# Altium PCB Lidar_MCU_PCB_4.PcbDoc
Units mm, origin at the board's own origin, x right, y up, seen from the top; angles counter-clockwise.
Board outline 72.35 x 42.48 mm, 4 copper layers (Top Layer 1, GND, 3V3, Bottom Layer 1), stack 0.567 mm thick; 42 components, 55 nets, 243 pads, 70 vias.
Unrouted connection lines stored in the file: 6.
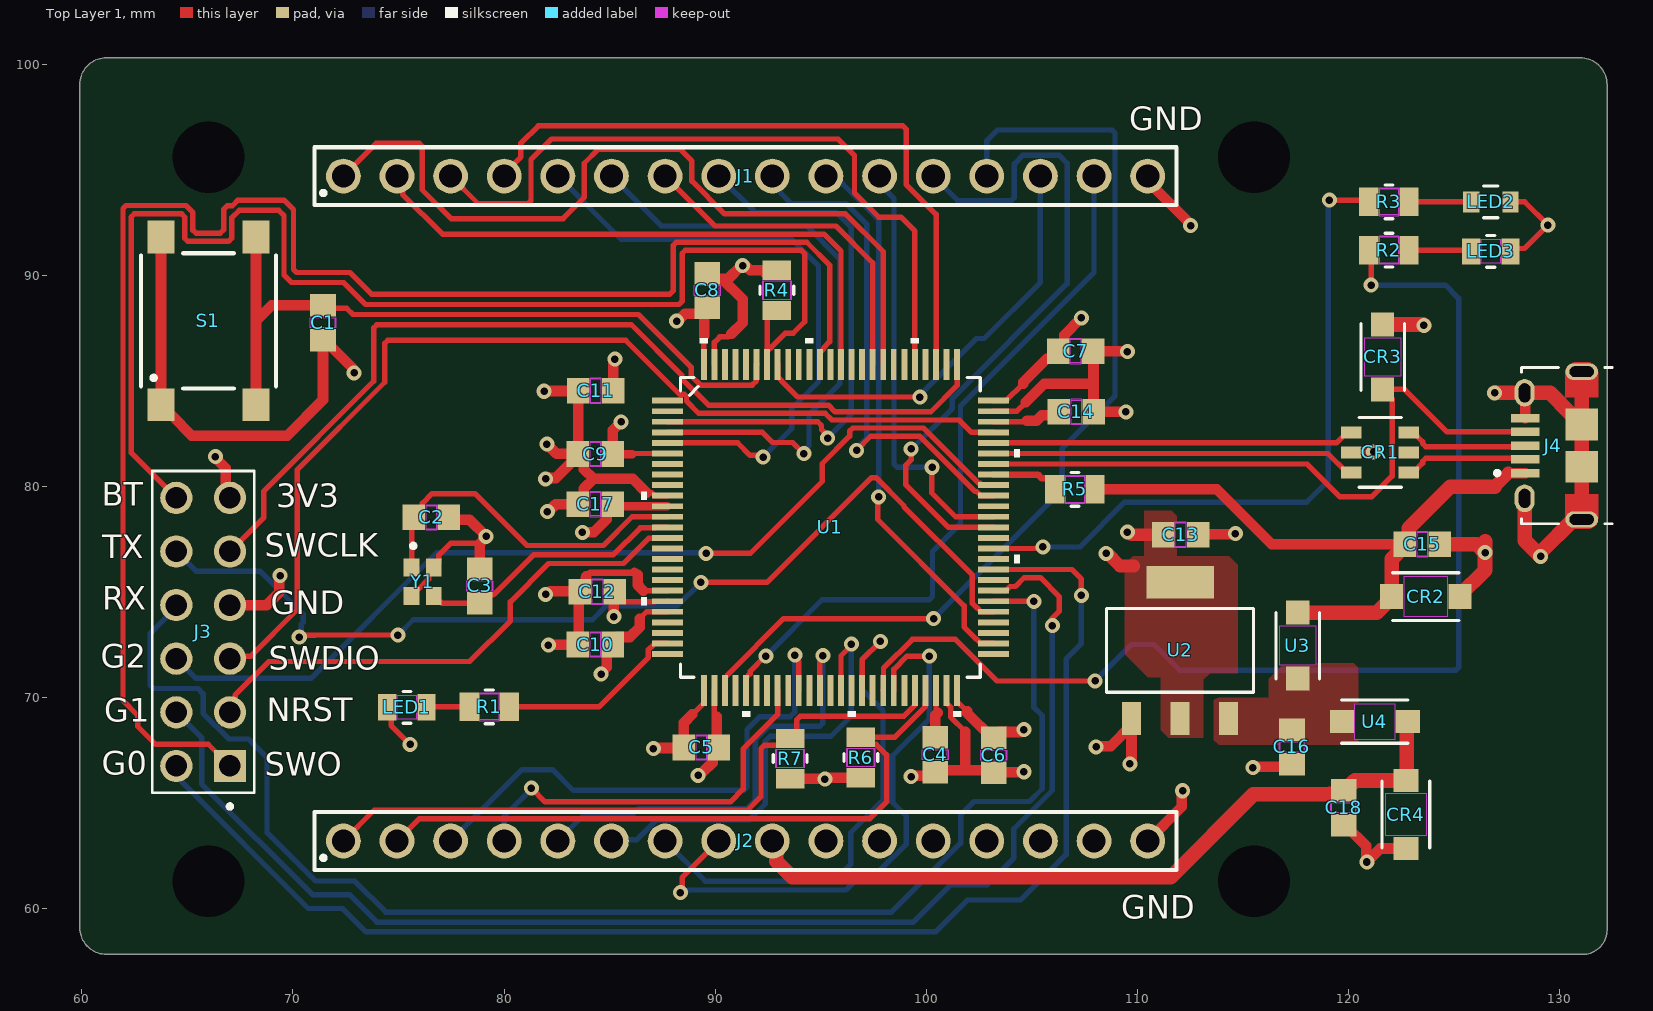
[diagram p0: Top Layer 1 view]
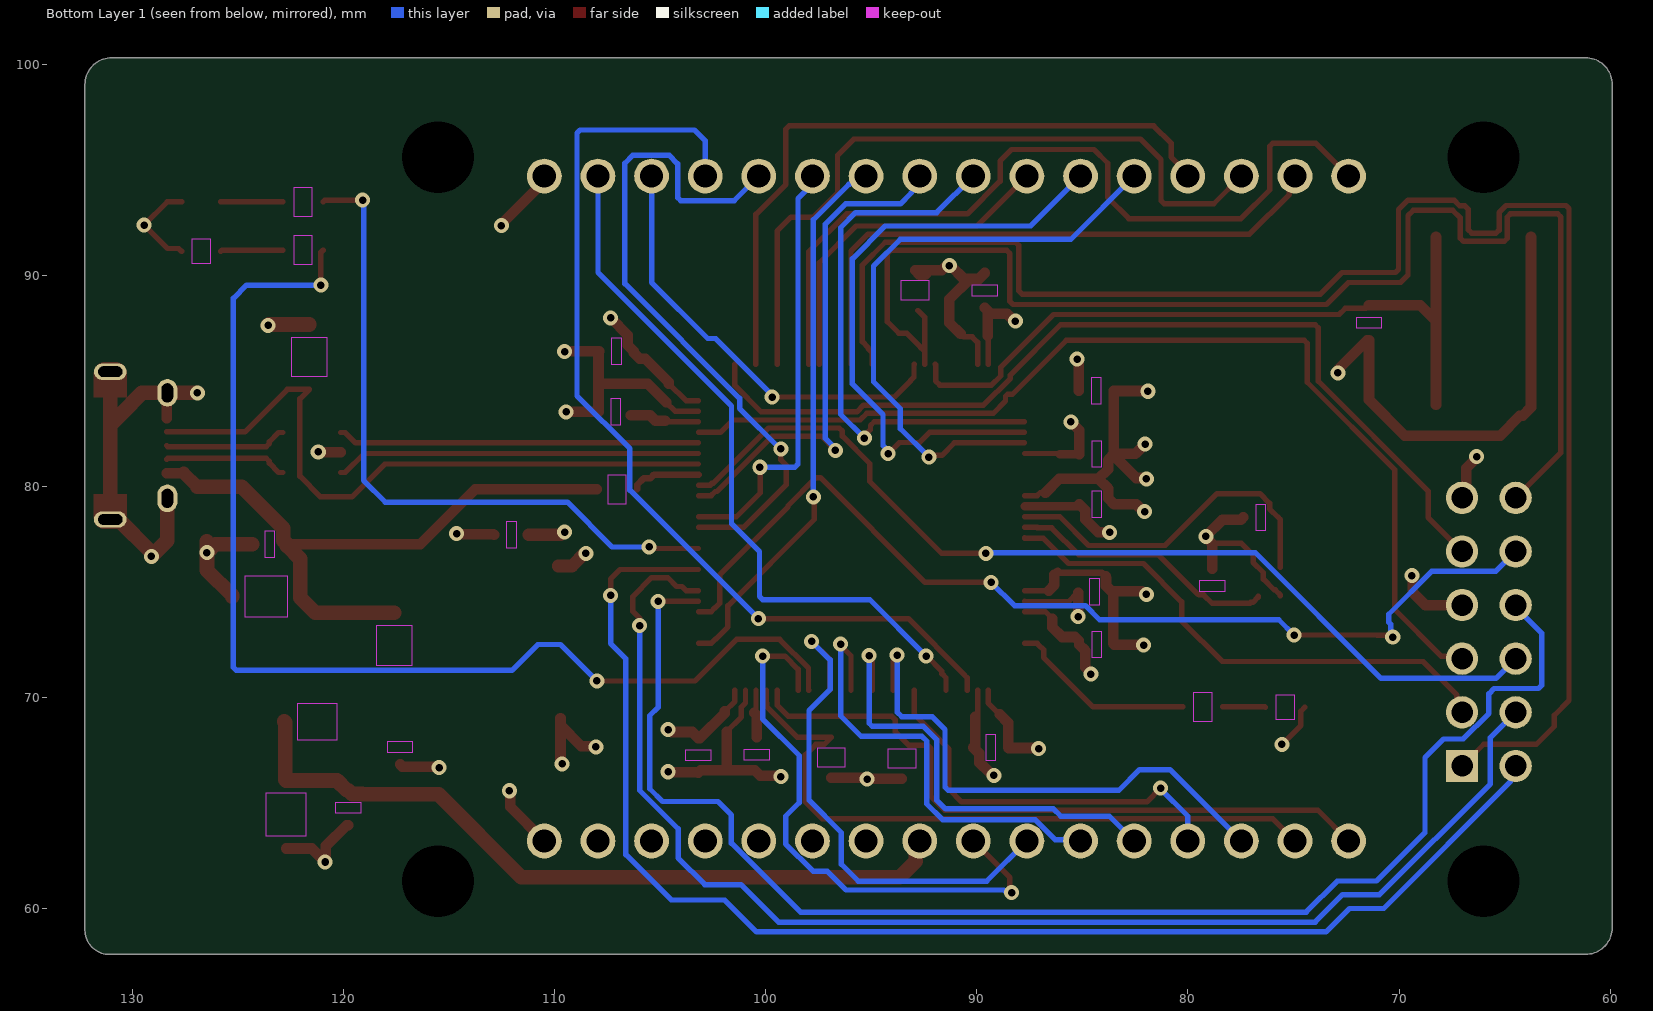
[diagram p1: Bottom Layer 1 view, seen from below]
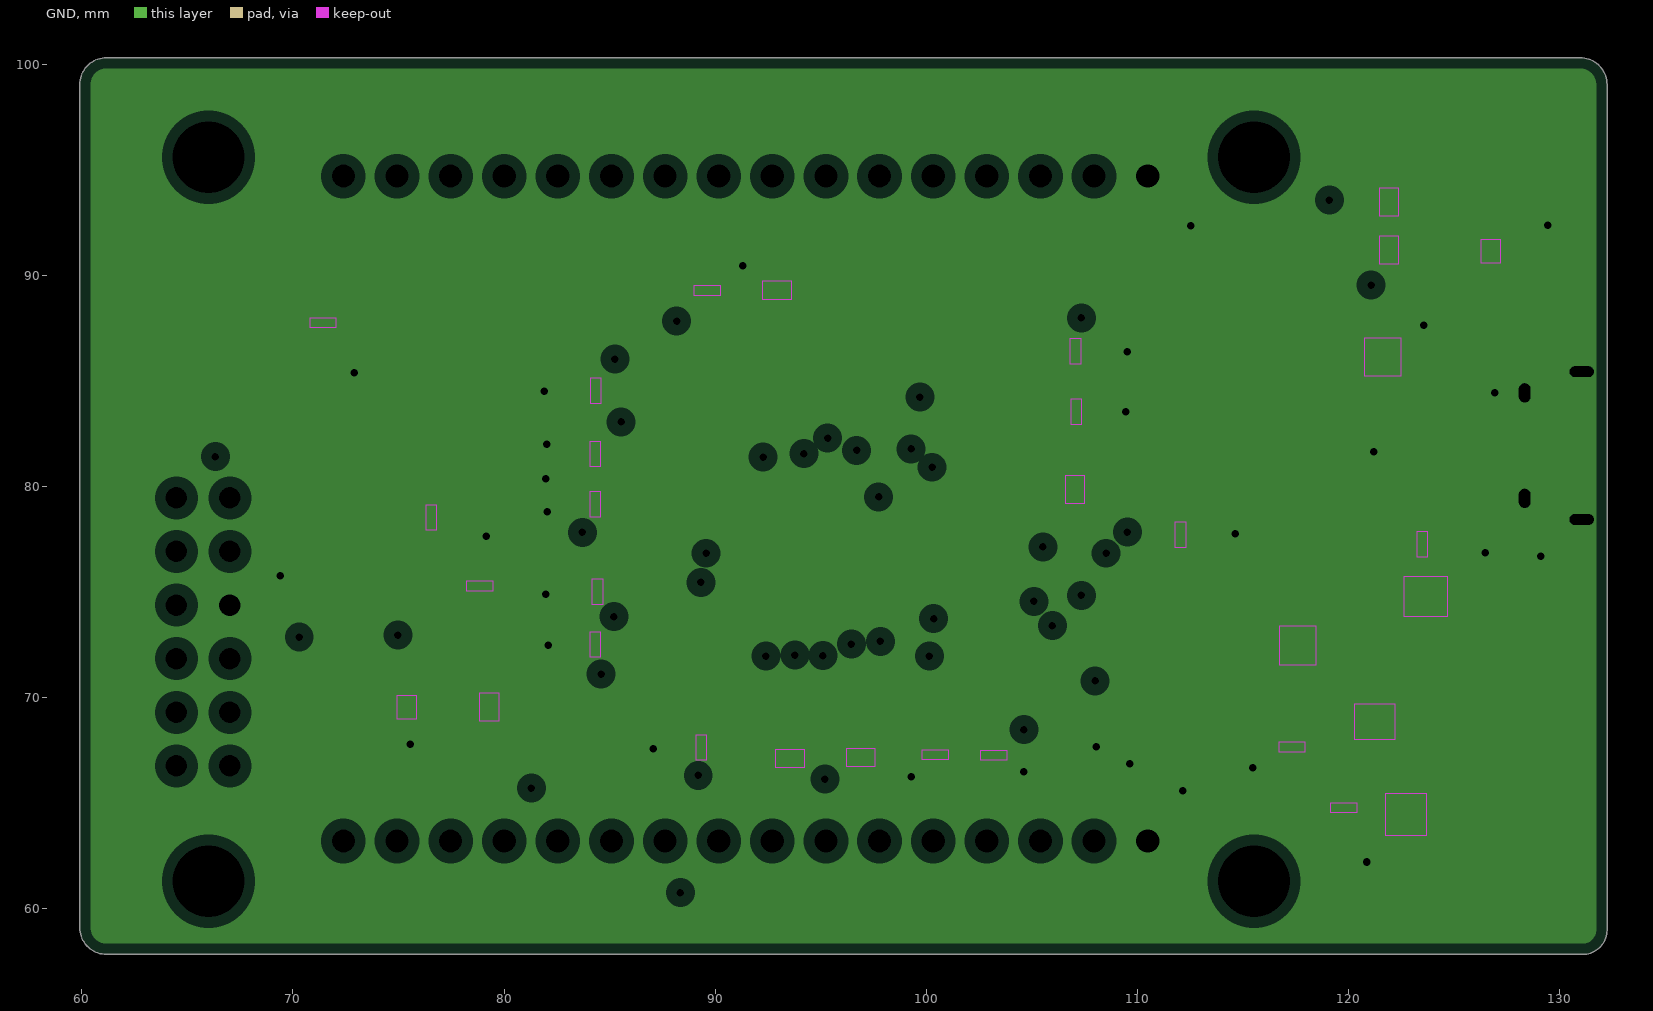
[diagram p2: GND, clearances drawn from the general rule]
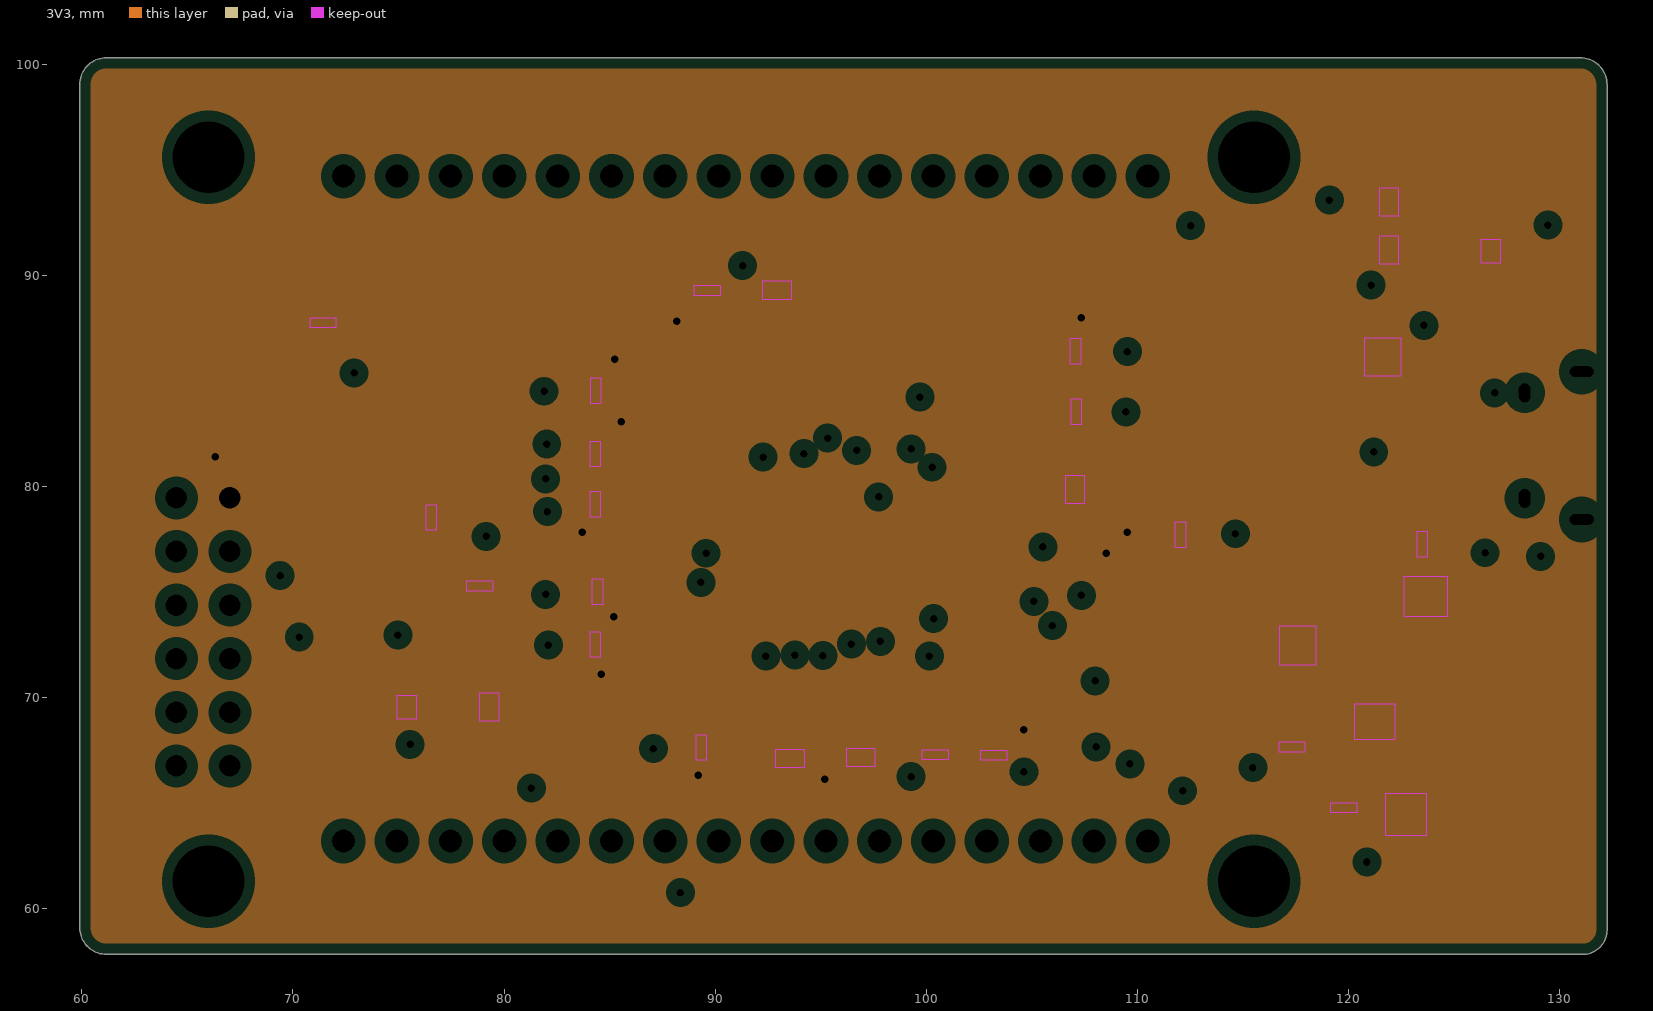
[diagram p3: 3V3, clearances drawn from the general rule]
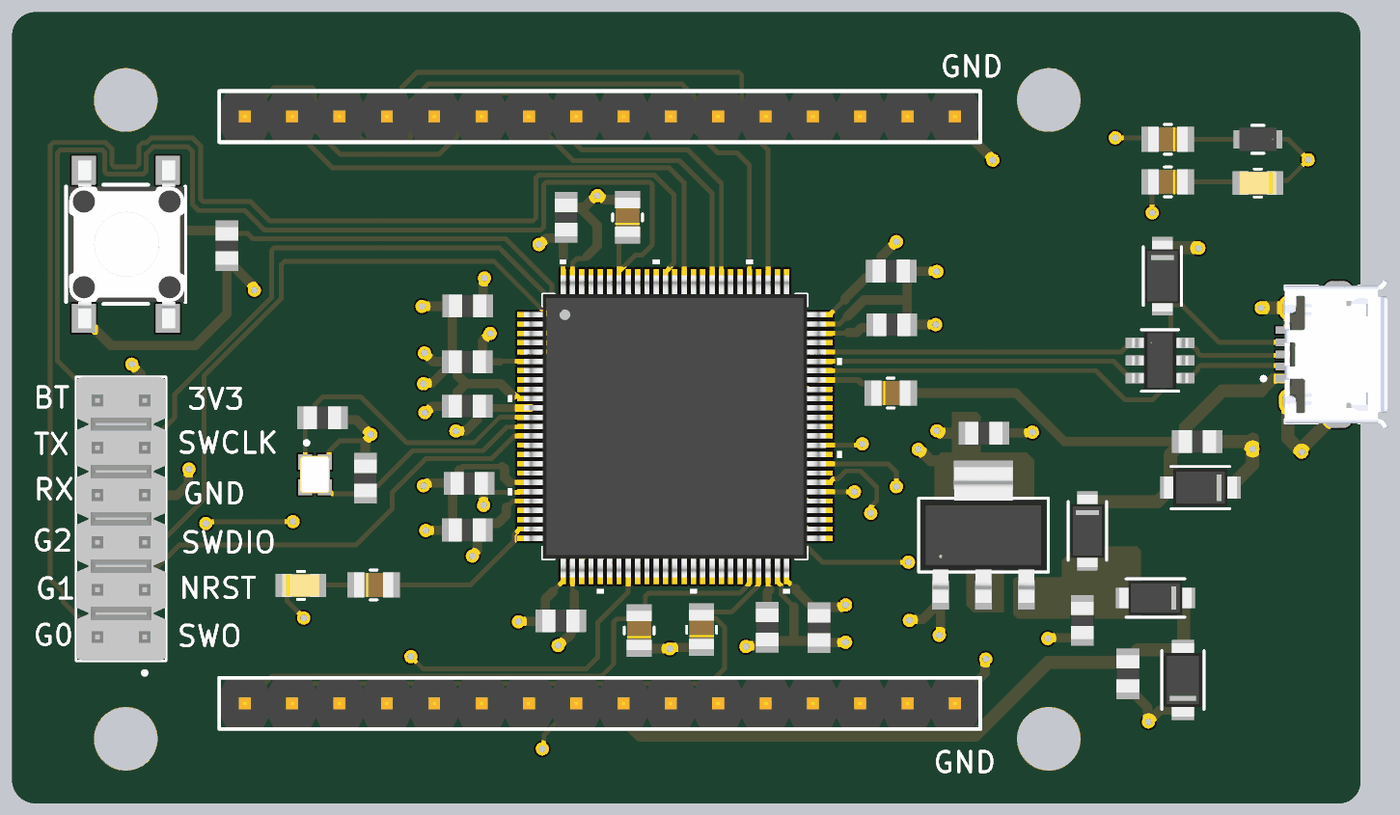
[diagram p4: 3D render of the assembled board from above, using the file's embedded part models]

## Layer stack, top to bottom
Top Solder: solder mask 0.0102, Solder Resist, Dk 3.5
Top Layer 1: signal copper 0.035
Dielectric 2: prepreg 0.0711, PP-006, Dk 4.1
GND: plane copper 0.0175, net GND
Dielectric 1: dielectric 0.32, FR-4, Dk 4.8
3V3: plane copper 0.0175, net 3V3
Dielectric 3: prepreg 0.0711, PP-006, Dk 4.1
Bottom Layer 1: signal copper 0.035
Bottom Solder: solder mask 0.0102, Solder Resist, Dk 3.5

## Board outline
59.9,59.095 ccw(c61.17,59.095) 61.17,57.825 131.1,57.825 ccw(c131.1,58.975) 132.25,58.975 132.25,99.03 ccw(c130.98,99.03) 130.98,100.3 61.17,100.3 ccw(c61.17,99.03) 59.9,99.03

## Design rules (kind name [scope] priority, off if disabled: settings)
Clearance [All] p1: gap=0.038 ignorepadtopadclearanceinfootprint=FALSE except(0.13: Arc-Arc Arc-Track Track-Track; 0.305: SMDPad-THPad)
DiffPairsRouting [All] p1: maxlimit=0.381 minlimit=0.15 mostfreqgap=0.3 toplayer_minwidth=0.24 toplayer_maxwidth=0.381 toplayer_prefwidth=0.3 bottomlayer_minwidth=0.24 bottomlayer_maxwidth=0.381 bottomlayer_prefwidth=0.3 maxuncoupledlength=12.7
HoleSize [All] p1: absolutevalues=TRUE maxlimit=3.81 minlimit=0.025 maxpercent=80.000 minpercent=20.000
MinimumSolderMaskSliver [All] p1: minsoldermaskwidth=0.038
PlaneClearance [All] p1: clearance=0.508
PlaneConnect [All] p1: planeconnectstyle=Direct reliefexpansion=0.508 reliefentries=4 reliefconductorwidth=0.254 reliefairgap=0.254
PolygonConnect [All] p1: connectstyle=Direct reliefconductorwidth=0.254 reliefentries=4 polygonreliefangle="90 Angle" airgapwidth=0.254
RoutingVias [All] p1: holewidth=0.356 width=0.711 viastyle="Through Hole" minholewidth=0.356 minwidth=0.635 maxholewidth=0.711 maxwidth=1.27
SilkToSolderMaskClearance [IsPad] p1: minsilkscreentomaskgap=0.18 clearancetoexposedcopper=TRUE
SolderMaskExpansion [All] p1: expansion=0.102 istentingtop=FALSE
SupplyNets "Schematic Supply Nets_2" [InNet('3V3')] p1: voltage=0.000
SupplyNets "Schematic Supply Nets_1" [InNet('GND')] p2: voltage=0.000
SupplyNets "Schematic Supply Nets" [InNet('5V_USB')] p3: voltage=0.000
Width [All] p1: maxlimit=1 minlimit=0.254 preferedwidth=0.254
24 further rules are at their usual default settings.

## Classes and differential pairs
net class GPIO_[0..2]: GPIO_0 GPIO_1 GPIO_2
net class DCMI_[0..11]: DCMI_0 DCMI_1 DCMI_2 DCMI_3 DCMI_4 DCMI_5 DCMI_6 DCMI_7 DCMI_8 DCMI_9 DCMI_10 DCMI_11
component class USB: CR1 CR3 J4
component class POWER: C15 C16 C17 C18 CR2 CR4 U2 U3 U4
component class MCU: C1 C2 C3 C4 C5 C6 C7 C8 C9 C10 C11 C12 C13 C14 LED1 LED2 LED3 R1 R2 R3 R4 R5 R6 R7 S1 U1 Y1
component class Communications: J1 J2 J3
differential pair USB_FS_CN: +USB_FS_CN_P -USB_FS_CN_N
differential pair USB_FS: +USB_FS_P -USB_FS_N

## Components (designator, comment, footprint, x,y, rotation, side; value= is the part's Value field where it differs from the comment)
C1 "CC0805KRX7R7BB104" CC0805N_YAG 71.425,87.75 r90 top
C2 "CC0805KRX7R7BB104" CC0805N_YAG 76.549,78.525 r180 top
C3 "CC0805KRX7R7BB104" CC0805N_YAG 78.85,75.275 r270 top
C4 "CC0805KRX7R7BB104" CC0805N_YAG 100.425,67.275 r90 top
C5 "CC0805KRX7R7BB104" CC0805N_YAG 89.35,67.625 r0 top
C6 "CC0805KRX7R7BB104" CC0805N_YAG 103.2,67.249 r90 top
C7 "CC0805KRX7R7BB104" CC0805N_YAG 107.075,86.4 r180 top
C8 "CC0805KRX7R7BB104" CC0805N_YAG 89.625,89.276 r270 top
C9 "CC0805KRX7R7BB104" CC0805N_YAG 84.328,81.525 r0 top
C10 "CC0805KRX7R7BB104" CC0805N_YAG 84.325,72.5 r0 top
C11 "CC0805KRX7R7BB104" CC0805N_YAG 84.35,84.525 r0 top
C12 "CC0805KRX7R7BB104" CC0805N_YAG 84.424,75 r0 top
C13 "CC0805KRX7R7BB104" CC0805N_YAG 112.05,77.7 r180 top
C14 "CC0805KRX7R7BB104" CC0805N_YAG 107.1,83.525 r180 top
C15 "CC0805KRX7R7BB104" CC0805N_YAG 123.5,77.25 r180 top
C16 "CC0805KRX7R7BB104" CC0805N_YAG 117.325,67.65 r90 top
C17 "CC0805KRX7R7BB104" CC0805N_YAG 84.328,79.15 r0 top
C18 "CC0805KRX7R7BB104" CC0805N_YAG 119.775,64.775 r90 top
CR1 "USBLC6-2SC6" SOT23-6L_STM 121.5,81.6 r0 top
CR2 "SMF5.0A" SMFSeries_LTF 123.664,74.775 r0 top
CR3 "SZSMF5.0AT1G" CR_SZSMF_LTF 121.625,86.125 r90 top
CR4 "SMF5.0A" SMFSeries_LTF 122.725,64.45 r270 top
J1 "6130XX11121_61301611121" 61301611121 91.44,94.691 r0 top
J2 "6130XX11121_61301611121" 61301611121 91.44,63.195 r0 top
J3 "10129381-912001BLF" AMPHENOL_10129381-912001BLF 65.746,73.101 r90 top
J4 "10118194-0001LF" AMPHENOL_10118194-0001LF 131.05,81.925 r90 top
LED1 "LTST-C170KFKT" LED_LTST-C170KFKT_LTO 75.398,69.525 r0 top
LED2 "LTST-C171KRKT" LED_LTST-C171_LTO 126.746,93.472 r180 top
LED3 "LTST-C170KFKT" LED_LTST-C170KFKT_LTO 126.746,91.125 r180 top
R1 "RC0805FR-074K7L" RES_RC0805_YAG 79.3,69.55 r0 top
R2 "RC0805FR-074K7L" RES_RC0805_YAG 121.92,91.186 r180 top
R3 "RC0805FR-074K7L" RES_RC0805_YAG 121.92,93.472 r180 top
R4 "RC0805FR-074K7L" RES_RC0805_YAG 92.925,89.281 r90 top
R5 "RC0805FR-074K7L" RES_RC0805_YAG 107.047,79.85 r0 top
R6 "RC0805FR-074K7L" RES_RC0805_YAG 96.9,67.15 r90 top
R7 "RC0805FR-074K7L" RES_RC0805_YAG 93.55,67.1 r90 top
S1 "430182043816" 430182043816 66,87.833 r90 top
U1 "STM32H7A3VIT6" LQFP100 95.464,78.054 r0 top
U2 "LDL1117S33R" SOT223_STM 112.025,72.225 r0 top
U3 "MBR140SFT1G" SOD_40SFT1G_ONS 117.6,72.45 r90 top
U4 "MBR140SFT1G" SOD_40SFT1G_ONS 121.25,68.85 r0 top
Y1 "ECS-250-6-37-JTN-TR" XTAL_ECS-250-6-37-JTN-TR 76.15,75.475 r270 top

## Footprints (in the part's own frame and the unit in brackets; to place one, negate y for a bottom-side part, rotate by r counter-clockwise, add the part's x,y. Pads: shape width x height; smd on the part's side, far side on the other; paste and mask are expansions set on the pad)
61301611121 [mm]
  round 1.65 hole 1.1: 1(-19.05,0) 2(-16.51,0) 3(-13.97,0) 4(-11.43,0) 5(-8.89,0) 6(-6.35,0) 7(-3.81,0) 8(-1.27,0) 9(1.27,0) 10(3.81,0) 11(6.35,0) 12(8.89,0) 13(11.43,0) 14(13.97,0) 15(16.51,0) 16(19.05,0)
  silkscreen extent -20.42,-1.37 20.42,1.37, body extent -20.32,-1.27 20.32,1.27, height 8.69
430182043816 [mm]
  rect 1.55x1.3 smd: 1(-3.975,2.25) 2(-3.975,-2.25) 3(3.975,2.25) 4(3.975,-2.25)
  silkscreen extent -3.2,-3.2 3.2,3.2, body extent -4.5,-3.15 4.5,3.05, height 4.3
AMPHENOL_10118194-0001LF [mm]
  rect 0.4x1.35 smd: 1(-1.3,2.675) 2(-0.65,2.675) 3(0,2.675) 4(0.65,2.675) 5(1.3,2.675)
  oval 0.775x1.55 hole 0.5 slot 1.15 at 90 deg mask+0: SH1(-3.5,0) SH4(3.5,0)
  rect 1.5x1.55 smd: SH2(1,0) SH3(-1,0)
  oval 1.3x0.95 hole 0.55 slot 0.9 at 0 deg: SH5(-2.5,2.7) SH6(2.5,2.7)
  Top Layer 1 region: 3.471,0.774 3.497,0.772 3.523,0.769 3.549,0.764 3.574,0.758 3.6,0.751 3.624,0.742 3.648,0.732 3.672,0.721 3.695,0.708 3.717,0.694 3.739,0.68 3.76,0.664 3.78,0.647 3.799,0.629 3.817,0.61 3.834,0.59 3.85,0.569 3.864,0.547 3.878,0.525 3.891,0.502 3.902,0.478 3.912,0.454 3.921,0.43 3.928,0.404 3.934,0.379 3.939,0.353 3.942,0.327 3.944,0.301 3.945,0.275 3.945,-0.275 3.944,-0.301 3.942,-0.327 3.939,-0.353 3.934,-0.379 3.928,-0.404 3.921,-0.43 3.912,-0.454 3.902,-0.478 3.891,-0.502 3.878,-0.525 3.864,-0.547 3.85,-0.569 3.834,-0.59 3.817,-0.61 3.799,-0.629 3.78,-0.647 3.76,-0.664 3.739,-0.68 3.717,-0.694 3.695,-0.708 3.672,-0.721 3.648,-0.732 3.624,-0.742 3.6,-0.751 3.574,-0.758 3.549,-0.764 3.523,-0.769 3.497,-0.772 3.471,-0.774 3.445,-0.775 2.3,-0.775 2.3,0.775 3.445,0.775
  Top Layer 1 region: -2.3,-0.775 -3.445,-0.775 -3.471,-0.774 -3.497,-0.772 -3.523,-0.769 -3.549,-0.764 -3.574,-0.758 -3.6,-0.751 -3.624,-0.742 -3.648,-0.732 -3.672,-0.721 -3.695,-0.708 -3.717,-0.694 -3.739,-0.68 -3.76,-0.664 -3.78,-0.647 -3.799,-0.629 -3.817,-0.61 -3.834,-0.59 -3.85,-0.569 -3.864,-0.547 -3.878,-0.525 -3.891,-0.502 -3.902,-0.478 -3.912,-0.454 -3.921,-0.43 -3.928,-0.404 -3.934,-0.379 -3.939,-0.353 -3.942,-0.327 -3.944,-0.301 -3.945,-0.275 -3.945,0.275 -3.944,0.301 -3.942,0.327 -3.939,0.353 -3.934,0.379 -3.928,0.404 -3.921,0.43 -3.912,0.454 -3.902,0.478 -3.891,0.502 -3.878,0.525 -3.864,0.547 -3.85,0.569 -3.834,0.59 -3.817,0.61 -3.799,0.629 -3.78,0.647 -3.76,0.664 -3.739,0.68 -3.717,0.694 -3.695,0.708 -3.672,0.721 -3.648,0.732 -3.624,0.742 -3.6,0.751 -3.574,0.758 -3.549,0.764 -3.523,0.769 -3.497,0.772 -3.471,0.774 -3.445,0.775 -2.3,0.775
  silkscreen extent -3.7,-1.45 3.7,4.1, body extent -4.02,-2.68 4.02,2.85, height 2.67
AMPHENOL_10129381-912001BLF [mm]
  rect 1.53x1.53 / inner round 1.53 / far side rect 1.53x1.53 hole 1.02: 01(-6.35,-1.27)
  round 1.53 hole 1.02: 02(-6.35,1.27) 03(-3.81,-1.27) 04(-3.81,1.27) 05(-1.27,-1.27) 06(-1.27,1.27) 07(1.27,-1.27) 08(1.27,1.27) 09(3.81,-1.27) 10(3.81,1.27) 11(6.35,-1.27) 12(6.35,1.27)
  silkscreen extent -8.37,-2.41 7.62,2.41, body extent -7.62,-2.42 7.62,2.41, height 8.69
CC0805N_YAG [mil]
  rect 42x48 smd paste+0 mask+0: 1(-32.5,0) 2(32.5,0)
  Top Layer 1 keep-out region: -9.5,-22 -9.5,22 9.5,22 9.5,-22
  Keep-Out Layer region: -9.5,-24 -9.5,24 9.5,24 9.5,-24
  body extent -39,-24 39,24, height 28
CR_SZSMF_LTF [mil]
  rect 45x43 smd paste+0 mask+0: 1(-60.5,0) 2(60.5,0)
  Top Layer 1 keep-out region: -36,-33.5 -36,33.5 36,33.5 36,-33.5
  Keep-Out Layer region: -36,-33.5 -36,33.5 36,33.5 36,-33.5
  silkscreen extent -62,-41 62,41, body extent -75,-36 75,36, height 29
LED_LTST-C170KFKT_LTO [mil]
  rect 34x49 smd paste+0 mask+0: 1(-36.5,0) 2(36.5,0)
  Top Layer 1 keep-out region: -17.5,-22.5 -17.5,22.5 17.5,22.5 17.5,-22.5
  Keep-Out Layer region: -17.5,-22.5 -17.5,22.5 17.5,22.5 17.5,-22.5
  silkscreen extent -7,-30 7,30, body extent -39,-24 39,24, height 43
LED_LTST-C171_LTO [mil]
  rect 30x39 smd paste+0 mask+0: 1(-36.5,0) 2(36.5,0)
  silkscreen extent -13,-30 13,30, body extent -39,-24 39,24, height 32
LQFP100 [mil]
  rect 58x11 smd paste-29 mask+5: 1(-304,236.22) 2(-304,216.54) 3(-304,196.85) 4(-304,177.17) 5(-304,157.48) 6(-304,137.8) 7(-304,118.11) 8(-304,98.43) 9(-304,78.74) 10(-304,59.06) 11(-304,39.37) 12(-304,19.69) 13(-304,0) 14(-304,-19.68) 15(-304,-39.37) 16(-304,-59.06) 17(-304,-78.74) 18(-304,-98.43) 19(-304,-118.11) 20(-304,-137.8) 21(-304,-157.48) 22(-304,-177.17) 23(-304,-196.85) 24(-304,-216.54) 25(-304,-236.22) 51(304,-236.22) 52(304,-216.54) 53(304,-196.85) 54(304,-177.17) 55(304,-157.48) 56(304,-137.8) 57(304,-118.11) 58(304,-98.43) 59(304,-78.74) 60(304,-59.06) 61(304,-39.37) 62(304,-19.68) 63(304,0) 64(304,19.68) 65(304,39.37) 66(304,59.06) 67(304,78.74) 68(304,98.43) 69(304,118.11) 70(304,137.8) 71(304,157.48) 72(304,177.17) 73(304,196.85) 74(304,216.54) 75(304,236.22)
  rect 11x58 smd paste-29 mask+5: 26(-236.22,-304) 27(-216.54,-304) 28(-196.85,-304) 29(-177.17,-304) 30(-157.48,-304) 31(-137.8,-304) 32(-118.11,-304) 33(-98.43,-304) 34(-78.74,-304) 35(-59.06,-304) 36(-39.37,-304) 37(-19.68,-304) 38(0,-304) 39(19.68,-304) 40(39.37,-304) 41(59.06,-304) 42(78.74,-304) 43(98.43,-304) 44(118.11,-304) 45(137.8,-304) 46(157.48,-304) 47(177.17,-304) 48(196.85,-304) 49(216.54,-304) 50(236.22,-304) 76(236.22,304) 77(216.54,304) 78(196.85,304) 79(177.17,304) 80(157.48,304) 81(137.8,304) 82(118.11,304) 83(98.43,304) 84(78.74,304) 85(59.06,304) 86(39.37,304) 87(19.68,304) 88(0,304) 89(-19.68,304) 90(-39.37,304) 91(-59.06,304) 92(-78.74,304) 93(-98.43,304) 94(-118.11,304) 95(-137.8,304) 96(-157.48,304) 97(-177.17,304) 98(-196.85,304) 99(-216.54,304) 100(-236.22,304)
  silkscreen extent -353,-353 353,353, body extent -319,-319 319,319, height 63
RES_RC0805_YAG [mil]
  rect 36x53 smd paste+0 mask+0: 1(-37.5,0) 2(37.5,0)
  Top Layer 1 keep-out region: -17.5,-24.5 -17.5,24.5 17.5,24.5 17.5,-24.5
  Keep-Out Layer region: -17.5,-26.5 -17.5,26.5 17.5,26.5 17.5,-26.5
  silkscreen extent -7,-32 7,32, body extent -41,-26 41,26, height 24
SMFSeries_LTF [mil]
  rect 42.87x47 smd paste+0 mask+0: 1(-63.44,0) 2(63.44,0)
  Top Layer 1 keep-out region: -40,-37.5 -40,37.5 40,37.5 40,-37.5
  Keep-Out Layer region: -40,-37.5 -40,37.5 40,37.5 40,-37.5
  silkscreen extent -62,-44 62,44, body extent -77,-39 77,39, height 43
SOD_40SFT1G_ONS [mil]
  rect 44.87x43 smd paste+0 mask+0: 1(-61.44,0) 2(61.44,0)
  Top Layer 1 keep-out region: -37,-33.5 -37,33.5 37,33.5 37,-33.5
  Keep-Out Layer region: -37,-33.5 -37,33.5 37,33.5 37,-33.5
  silkscreen extent -62,-41 62,41, body extent -76,-36 76,36, height 39
SOT23-6L_STM [mil]
  rect 38.5x22 smd paste+0 mask+0: 1(-53.75,37.4) 2(-53.75,0) 3(-53.75,-37.4) 4(53.75,-37.4) 5(53.75,0) 6(53.75,37.4)
  silkscreen extent -40,-65 40,65, body extent -59,-60 59,60, height 57
SOT223_STM [mil]
  rect 35.46x61 smd paste+0 mask+0: 1(-90.55,-127) 2(0,-127) 3(90.55,-127)
  rect 126x61 smd paste+0 mask+0: 4(0,127)
  silkscreen extent -137,-78 137,78, body extent -132,-144 132,144, height 71
XTAL_ECS-250-6-37-JTN-TR [mm]
  rect 0.85x0.75 smd: 1(-0.675,-0.525) 2(0.675,-0.525) 3(0.675,0.525) 4(-0.675,0.525)
  silkscreen extent -1.8,-0.55 -1.6,-0.35, body extent -1,-0.8 1,0.8, height 0.55

## Part data
C1 C2 C3 C4 C5 C6 C7 C8 C9 C10 C11 C12 C13 C14 C15 C16 C17 C18: "Description", Manufacturer_Name=Yageo, Copyright="Copyright (C) 2025 Ultra Librarian. All rights reserved.", Manufacturer_Part_Number=CC0805KRX7R7BB104
CR1: "ESD Protection for USB 2.0 High Speed", Manufacturer_Name=STMicroelectronics, Copyright="Copyright (C) 2025 Ultra Librarian. All rights reserved.", Manufacturer_Part_Number=USBLC6-2SC6, RefDes=RefDes, Type=Type
CR2 CR3 CR4: "Description", Manufacturer_Name="Littelfuse Inc", Copyright="Copyright (C) 2025 Ultra Librarian. All rights reserved."
  CR2 CR4: Manufacturer_Part_Number=SMF5.0A
  CR3: Manufacturer_Part_Number=SZSMF5.0AT1G
J1 J2: Package=None, Availability=Unavailable, MF="{'manufacturer': u'Wurth Electronics'}", MP=61301611121, Price=None
J3: "EconoStikâ„¢, Board to Board connector, Unshrouded Vertical Header, Through Hole, Double Row, 12 Positions, 2.54 mm (0.100in) Pitch.", Package=None, Check_prices=https://www.snapeda.com/parts/10129381-912001BLF/Amphenol+FCI/view-part/?ref=eda, Digi-Key_Part_Number=10129381-912001BLF-ND, MF="Amphenol ICC (FCI)", MP=10129381-912001BLF, Purchase-URL=https://pricing.snapeda.com/search/part/10129381-912001BLF/?ref=eda, SnapEDA_Link=https://www.snapeda.com/parts/10129381-912001BLF/Amphenol+FCI/view-part/?ref=snap
J4: "Micro USB, Input Output Connectors, B TYPE RECEPTACLE with flange", Package=None, Check_prices=https://www.snapeda.com/parts/10118194-0001LF/Amphenol+FCI/view-part/?ref=eda, MF="Amphenol ICC", MP=10118194-0001LF, SnapEDA_Link=https://www.snapeda.com/parts/10118194-0001LF/Amphenol+FCI/view-part/?ref=snap
LED1 LED2 LED3: "Description", Manufacturer_Name=LITE-ON, Copyright="Copyright (C) 2025 Ultra Librarian. All rights reserved."
  LED1 LED3: Manufacturer_Part_Number=LTST-C170KFKT
  LED2: Manufacturer_Part_Number=LTST-C171KRKT, Type="LED Indication"
R1 R2 R3 R4 R5 R6 R7: "RES SMD 4.7 k? 1% 1/8W 0805", Manufacturer_Name=Yageo, Copyright="Copyright (C) 2025 Ultra Librarian. All rights reserved.", Manufacturer_Part_Number=RC0805FR-074K7L
S1: "6*6mm vertical type, SMT, height 4.3mm, black actuator, 160gf, T&R", Package=None, Check_prices=https://www.snapeda.com/parts/430182043816/Wurth+Electronics/view-part/?ref=eda, MF="Wurth Electronics", MP=430182043816, SnapEDA_Link=https://www.snapeda.com/parts/430182043816/Wurth+Electronics/view-part/?ref=snap
U1: "High-performance and DSP with DP-FPU, Arm Cortex-M7  MCU with 2MBytes of Flash memory, 1376 KB SRAM, 280 MHz CPU, L1 cache, graphic accelerations, external memory interfaces, SMPS and large set of peripherals", Manufacturer_Name=STMicroelectronics, Copyright="Copyright (C) 2025 Ultra Librarian. All rights reserved.", Manufacturer_Part_Number=STM32H7A3VIT6, RefDes=RefDes, Type=Type
U2: "1.2 A High PSRR low dropout linear voltage regulator", Manufacturer_Name=STMicroelectronics, Copyright="Copyright (C) 2025 Ultra Librarian. All rights reserved.", Manufacturer_Part_Number=LDL1117S33R, RefDes=RefDes, Type=Type
U3 U4: "Description", Manufacturer_Name=onsemi, Copyright="Copyright (C) 2026 Ultra Librarian. All rights reserved.", Manufacturer_Part_Number=MBR140SFT1G, RefDes=RefDes, Type=Type
Y1: "SMD Crystal 2.0 x 1.6 x 0.45 mm ceramic package", Package=None, Availability=Unavailable, ComponentLink1Description="New link", MP=ECS-250-6-37-JTN-TR, Price=None

## Free pads (board coordinates)
  round 1.524 hole 3.4: 2(66,61.29) 2(66,95.58) 2(115.53,61.29) 2(115.53,95.58)

## Via types
v1: diameter 0.711, hole 0.356, Top Layer 1 to Bottom Layer 1, 70 vias

## Nets (pads, with @x,y where several pads share a name; then routed paths per layer and width w, separated by ;. In a path a pad name is that pad's centre, name@x,y a point inside that pad or via, vN(x,y) a via of type N, cw(c..) or ccw(c..) an arc to the next point about the centre after c; other vN are vias at no path point)
3V3: C5.2 C6.2 C7.2 C8.2 C9.2 C10.2 C11.2 C12.2 C13.2 C17.2 J3.11 R6.1 R7.1 U1.6 U1.11 U1.20 U1.21 U1.27 U1.50 U1.75 U1.100 U2.2 U2.4 | length 48.2
  Top Layer 1 w0.254: C17.2 C17.2@85.249,79.054 ; C12.2@85.2,74.95 C12.2 ; C12.2@85.25,74.96 85.25,74.933 85.656,74.527 87.118,74.527 87.133,74.541 87.73,74.541 U1.20 ; 86.075,81.525 86.104,81.554 U1.6 ; 86.425,73.725 86.754,74.054 U1.21 ; U1.100 89.464,87.114 89.475,87.125 ; U1.27 89.964,69.186 90.075,69.075 ; U1.50 101.464,69.807 101.921,69.35 101.95,69.35 ; U1.75 103.782,84.054 104.578,84.85 104.6,84.85
  Top Layer 1 w0.4: C9.2 86.075,81.525 ; C17.2@85.249,79.054 U1.11
  Top Layer 1 w0.5: v1(66.325,81.4) 66.325,81.343 66.819,80.849 66.819,79.927 67.016,79.73 J3.11 ; v1(83.715,77.815) 84.252,77.815 84.87,78.434 84.87,78.867 C17.2 ; v1(84.6,71.1) 84.6,71.157 84.867,71.424 84.867,72.217 C10.2 ; C9.2 85.153,82.653 v1(85.55,83.05) v1@85.55,83.107 ; C10.2@85.175,72.675 85.36,72.86 85.957,72.86 86.425,73.328 86.425,73.725 ; C11.2 85.175,85.893 85.25,85.968 v1(85.25,86.025) ; v1(85.2,73.825) C12.2@85.2,74.95 ; v1(88.175,87.825) 88.232,87.825 88.574,88.167 89.342,88.167 C8.2 ; v1(89.2,66.3) 89.257,66.3 89.684,66.727 89.711,66.727 89.892,66.909 89.892,67.342 C5.2 90.075,67.726 90.075,69.075 ; 89.475,87.125 C8.2@89.475,88.3 ; R7.1 93.561,66.136 95.189,66.136 v1(95.2,66.125) 95.257,66.125 95.33,66.198 R6.1 ; 101.95,69.35 101.95,69.249 103.124,68.075 C6.2 103.483,68.358 104.451,68.358 104.568,68.475 v1(104.625,68.475) ; 104.6,84.85 104.6,84.926 105.714,86.04 105.966,86.04 106.25,86.324 C7.2 106.533,86.683 106.533,87.158 v1(107.35,87.975) ; v1(109.525,77.825) 109.582,77.825 v1@109.707,77.7
  Top Layer 1 w0.6: v1(108.525,76.825) 108.582,76.825 109.182,76.225 109.825,76.225 ; v1@109.707,77.7 C13.2
5V_USB: C15.2 CR2.1 J4.1 R5.2 U3.2 | length 30.7
  Top Layer 1 w0.5: R5.2 113.767,79.85 116.367,77.25 C15.2 ; 127.575,80.625 J4.1
  Top Layer 1 w0.6: 126.925,79.975 127.575,80.625
  Top Layer 1 w0.7: U3.2 121.34,74.01 122.052,74.723 CR2.1 122.052,76.552 122.675,77.174 C15.2 122.858,77.433 122.858,78.008 124.825,79.975 126.925,79.975
BOOT0: J3.12 R4.1 U1.94 | length 62.7
  Top Layer 1 w0.254: J3.12 62.334,81.593 62.334,92.751 62.483,92.9 64.726,92.9 64.875,92.751 64.875,91.749 65.024,91.6 66.951,91.6 67.1,91.749 67.1,92.714 67.461,93.075 69.325,93.075 69.575,92.825 69.575,90 69.925,89.65 72.4,89.65 73.438,88.612 88.286,88.612 88.435,88.761 88.435,91.024 88.584,91.173 94.092,91.173 94.241,91.024 94.241,87.791 93.7,87.25 93.329,87.25 92.656,86.578 92.656,86.565 U1.94@92.464,86.372 ; U1.94 U1.94@92.464,86.372 ; R4.1@92.794,88.325 92.791,88.325 92.464,87.998 U1.94@92.464,86.372
CC_RESET: J2.4 U1.33 | length 18.9
  Top Layer 1 w0.254: v1(81.3,65.7) 81.95,65.05 90.725,65.05 91.325,65.65 91.325,67.55 92.964,69.189 U1.33
  Bottom Layer 1 w0.254: J2.4 80.01,64.372 81.3,65.662 v1(81.3,65.7)
CC_SHUTTER: J2.3 U1.35 | length 25.7
  Top Layer 1 w0.254: v1(93.775,72) 93.775,71.876 93.964,71.687 U1.35
  Bottom Layer 1 w0.254: J2.3 80.851,66.576 82.299,66.576 83.275,65.6 91.362,65.6 91.511,65.749 91.511,68.474 92.119,69.083 93.558,69.083 93.775,69.3 v1(93.775,72)
DCMI_0: J1.12 U1.63 | length 32.2
  Top Layer 1 w0.254: v1(99.288,81.765) 99.288,81.251 99.025,80.989 99.025,80.075 101.046,78.054 U1.63
  Bottom Layer 1 w0.254: v1(99.288,81.765) 99.315,81.765 101.241,83.691 101.241,84.166 106.675,89.6 106.675,95.301 106.295,95.681 104.581,95.681 104.175,95.275 104.175,93.674 104.026,93.525 101.496,93.525 J1.12
DCMI_1: J1.11 U1.64 | length 20.4
  Top Layer 1 w0.254: v1(100.275,80.9) 100.261,80.886 100.261,79.689 101.396,78.554 U1.64
  Bottom Layer 1 w0.254: J1.11 97.79,94.313 98.475,93.628 98.475,81.049 98.624,80.9 v1(100.275,80.9)
DCMI_2: J1.10 U1.52 | length 26.1
  Top Layer 1 w0.254: v1(97.75,79.5) 97.7,79.45 97.7,78.437 101.8,74.337 101.8,73.33 102.384,72.746 102.396,72.746 102.589,72.554 U1.52
  Bottom Layer 1 w0.254: J1.10 95.628,94.691 96.012,94.306 96.063,94.306 97.75,92.619 v1(97.75,79.5)
DCMI_3: J1.9 U1.66 | length 24.5
  Top Layer 1 w0.254: v1(96.7,81.7) 97.373,82.373 99.686,82.373 102.31,79.749 102.393,79.749 102.589,79.554 U1.66
  Bottom Layer 1 w0.254: J1.9 92.71,94.313 93.108,93.915 93.108,93.892 93.625,93.375 96.225,93.375 97.175,92.425 97.175,82.267 96.7,81.792 v1(96.7,81.7)
DCMI_4: J1.8 U1.3 | length 25.8
  Top Layer 1 w0.254: U1.3 94.861,83.054 95.04,82.874 95.04,82.684 95.325,82.399 v1(95.325,82.275)
  Bottom Layer 1 w0.254: J1.8 91.903,92.958 95.744,92.958 96.45,92.253 96.45,83.4 v1(95.325,82.275)
DCMI_5: J1.7 U1.84 | length 16.3
  Top Layer 1 w0.254: J1.7 89.996,92.325 95.725,92.325 97.464,90.586 U1.84
DCMI_6: J1.6 U1.4 | length 29.2
  Top Layer 1 w0.254: U1.4 92.246,82.554 92.725,82.075 93.675,82.075 v1(94.2,81.55)
  Bottom Layer 1 w0.254: J1.6 87.456,92.325 94.35,92.325 95.9,90.775 95.9,84.85 94.45,83.4 94.45,81.924 94.2,81.674 v1(94.2,81.55)
DCMI_7: J1.5 U1.5 | length 29.1
  Top Layer 1 w0.254: U1.5 91.071,82.054 91.663,81.462 92.188,81.462 v1(92.275,81.375)
  Bottom Layer 1 w0.254: J1.5 85.541,91.7 93.625,91.7 94.826,90.499 94.9,90.425 94.9,84.95 93.631,83.681 93.631,82.731 v1(92.275,81.375)
DCMI_8: J1.4 U1.78 | length 32.3
  Top Layer 1 w0.254: J1.4 80.01,94.816 80.8,95.606 80.8,96.252 81.624,97.075 98.901,97.075 99.05,96.926 99.05,94.298 100.468,92.88 U1.78@100.468,85.779
DCMI_9: J1.3 U1.80 | length 34.1
  Top Layer 1 w0.254: J1.3 78.778,93.383 81.126,93.383 81.275,93.532 81.275,95.476 82.249,96.45 95.825,96.45 96.6,95.675 96.6,93.9 97.75,92.75 98.8,92.75 99.464,92.086 U1.80
DCMI_10: J1.2 U1.87 | length 28.2
  Top Layer 1 w0.254: J1.2 75.197,94.424 75.197,93.828 77.084,91.941 95.159,91.941 95.964,91.136 U1.87
DCMI_11: J1.1 U1.83 | length 39.1
  Top Layer 1 w0.254: J1.1 73.949,96.25 75.976,96.25 76.125,96.101 76.125,94.039 77.489,92.675 82.8,92.675 83.8,93.675 83.8,95.301 84.449,95.95 88.35,95.95 88.9,95.4 88.9,94.45 90.45,92.9 96.175,92.9 97.964,91.111 U1.83
DCMI_HSYNC: J1.13 U1.28 | length 46.2
  Top Layer 1 w0.254: U1.28 90.464,70.929 90.656,71.122 90.656,71.134 93.247,73.725 v1(100.35,73.725)
  Bottom Layer 1 w0.254: v1(100.35,73.725) 106.438,79.813 106.438,81.779 108.94,84.281 108.94,96.726 108.791,96.875 103.375,96.875 102.87,96.37 J1.13
DCMI_PIXCLK: J1.15 U1.30 | length 34.2
  Top Layer 1 w0.254: U1.30 91.464,70.929 91.659,71.124 91.659,71.234 92.375,71.95 v1(92.4,71.95)
  Bottom Layer 1 w0.254: v1(92.4,71.95) 95.075,74.625 100.151,74.625 100.3,74.774 100.3,76.9 101.625,78.225 101.625,83.8 107.95,90.125 J1.15
DCMI_VSYNC: J1.14 U1.93 | length 20.8
  Top Layer 1 w0.254: U1.93 92.977,85.763 92.977,85.166 93.159,84.984 93.159,84.971 93.905,84.225 v1(99.7,84.225)
  Bottom Layer 1 w0.254: v1(99.7,84.225) 99.7,84.325 102.374,86.999 102.749,86.999 105.41,89.66 J1.14
DEBUG_SWCLK: J3.09 U1.76 | length 44.4
  Top Layer 1 w0.254: J3.09 68.625,78.52 68.625,79.775 73.825,84.975 73.825,87.501 73.974,87.65 86.029,87.65 88.415,85.263 88.415,85.11 89.684,83.841 95.37,83.841 95.686,83.525 100.215,83.525 101.464,84.774 U1.76
DEBUG_SWDIO: J3.05 U1.72 | length 49.3
  Top Layer 1 w0.254: J3.05 67.14,71.955 68.005,71.955 70.2,74.15 70.2,80.775 74.35,84.925 74.35,86.768 74.499,86.917 85.762,86.917 88.32,84.359 88.547,84.359 88.644,84.262 88.644,84.035 89.222,83.457 95.211,83.457 95.527,83.141 101.559,83.141 102.146,82.554 U1.72
DEBUG_SWO: J3.01 U1.89 | length 76.9
  Top Layer 1 w0.254: J3.01 65.99,67.777 63.496,67.777 62.65,68.624 62.65,69.15 61.95,69.85 61.95,93.151 62.099,93.3 64.925,93.3 65.259,92.966 65.259,92.133 65.408,91.984 66.551,91.984 66.716,92.149 66.716,93.116 66.882,93.282 67.125,93.282 67.393,93.55 69.575,93.55 70.025,93.1 70.025,90.274 70.174,90.125 72.7,90.125 73.725,89.1 87.863,89.1 88.011,89.249 88.011,91.408 88.16,91.557 94.34,91.557 95.425,90.472 95.425,86.846 95.159,86.581 95.159,86.534 95.01,86.385 94.977,86.385 94.964,86.372 U1.89
ENABLE_1V8_3V3: J2.6 U1.39 | length 21.4
  Top Layer 1 w0.254: U1.39 95.964,71.969 96.45,72.455 v1(96.45,72.525)
  Bottom Layer 1 w0.254: J2.6 85.156,63.261 86.296,63.261 87.241,64.206 91.631,64.206 92.375,64.95 92.375,67.925 92.6,68.15 95.476,68.15 96.45,69.124 v1(96.45,72.525)
ENABLE_5V_10V: J2.5 U1.37 | length 21.4
  Top Layer 1 w0.254: U1.37 94.964,71.715 95.1,71.851 v1(95.1,71.975)
  Bottom Layer 1 w0.254: J2.5 83.73,64.375 86.028,64.375 86.369,64.716 91.489,64.716 91.895,65.122 91.895,67.988 92.532,68.625 94.951,68.625 95.1,68.774 v1(95.1,71.975)
Enable_15VDC: J2.8 U1.44 | length 27.7
  Top Layer 1 w0.254: v1(88.35,60.75) 88.437,60.837 88.437,61.462 J2.8 ; U1.44 98.464,71.325 99.089,71.95 v1(100.15,71.95)
  Bottom Layer 1 w0.254: v1(88.35,60.75) 88.437,60.837 88.689,60.837 88.727,60.876 96.201,60.876 97.093,61.768 97.763,61.768 99.057,63.062 99.057,64.368 98.416,65.009 98.416,67.241 100.15,68.975 v1(100.15,71.95)
ENABLE_M10V: J2.7 U1.41 | length 24.6
  Top Layer 1 w0.254: U1.41 96.964,71.789 v1(97.825,72.65)
  Bottom Layer 1 w0.254: J2.7 89.538,61.287 95.612,61.287 96.425,62.1 96.425,63.6 97.952,65.127 97.952,69.373 96.95,70.375 96.95,71.775 v1(97.825,72.65)
GND: C1.1 C2.1 C3.1 C4.1 C5.1 C6.1 C7.1 C8.1 C9.1 C10.1 C11.1 C12.1 C13.1 C14.1 C15.1 C16.1 C17.1 C18.1 CR1.2 CR2.2 CR3.2 CR4.2 J1.16 J2.16 J3.07 J4.5 J4.SH1 J4.SH2 J4.SH3 J4.SH4 J4.SH5 J4.SH6 LED1.1 LED2.1 LED3.1 R4.2 S1.1 S1.3 U1.10 U1.19 U1.26 U1.49 U1.74 U1.99 U2.1 Y1.2 Y1.4 | length 150
  Top Layer 1 w0.254: LED1.1 74.655,69.341 74.655,68.67 v1(75.55,67.775) ; Y1.2 75.625,74.85 75.873,75.098 75.923,75.098 76.427,75.602 76.427,75.902 76.915,76.39 76.915,76.74 77.471,77.296 78.821,77.296 ; 86.596,75.054 U1.19 ; 86.757,79.7 86.999,79.7 87.145,79.554 U1.10 ; 88.925,69.197 89.464,69.735 U1.26 ; U1.99 89.964,86.814 90.225,87.075 90.625,87.075 90.775,87.225 ; U1.49 100.964,69.735 101.159,69.54 101.159,69.066 101.85,68.375 ; U1.74 104.303,83.554 104.724,83.975 ; LED3.1 127.81,91.262 128.337,91.262 v1(129.45,92.375) 128.353,93.472 LED2.1
  Top Layer 1 w0.3: 83.895,75.729 84.07,75.904 86.221,75.904
  Top Layer 1 w0.4: 83.882,75.64 83.895,75.652 ; 86.177,75.948 86.325,75.8
  Top Layer 1 w0.5: S1.1@63.75,83.733 64.15,83.333 64.275,83.333 65.208,82.4 69.725,82.4 71.425,84.1 C1.1 71.501,86.924 72.86,85.566 72.86,85.415 v1(72.9,85.375) ; S1.1 S1.3 ; J3.07 67.026,74.361 68.747,74.361 69.353,74.966 69.353,75.728 v1(69.393,75.768) ; C2.1 77.491,78.409 78.366,78.409 v1(79.15,77.625) 79.15,77.568 78.85,77.268 C3.1 ; v1(81.9,84.5) 81.912,84.513 83.512,84.513 C11.1@83.514,84.514 ; v1(81.975,74.875) 82.032,74.875 82.182,75.025 83.574,75.025 C12.1 ; v1(81.975,80.35) 82.015,80.39 82.444,80.39 83.502,81.449 C9.1 ; v1(82.025,82) 82.488,81.538 83.49,81.538 C9.1 ; v1(82.05,78.8) 82.103,78.8 82.44,79.137 83.49,79.137 83.786,79.433 83.786,79.891 84.245,80.35 ; v1(82.1,72.475) 82.113,72.488 83.487,72.488 C10.1 83.549,72.55 83.549,74.95 C12.1 ; C11.1 C11.1@83.514,84.514 ; 83.882,75.64 83.882,75.283 C12.1 ; 83.895,75.652 83.895,75.729 ; 86.325,75.8 86.325,75.325 86.596,75.054 ; 86.757,79.7 86.75,79.7 86.1,80.35 84.245,80.35 ; v1(87.075,67.575) 87.1,67.6 88.5,67.6 C5.1 88.524,68.796 88.925,69.197 ; C8.1 89.908,89.818 90.341,89.818 ; 90.775,87.225 91.3,87.75 91.3,88.859 90.341,89.818 ; 92.249,90.233 92.457,90.026 92.718,90.026 R4.2 91.658,90.233 91.482,90.41 91.34,90.41 v1(91.3,90.45) 91.243,90.45 90.61,89.818 90.341,89.818 ; v1(99.281,66.244) 99.321,66.285 100.261,66.285 100.526,66.55 101.85,66.55 ; 101.85,68.375 101.85,66.55 ; v1(104.625,66.475) 104.6,66.45 103.226,66.45 C6.1 103.074,66.55 101.85,66.55 ; 104.724,83.975 105.596,84.847 107.925,84.847 ; C7.1 107.913,86.388 109.513,86.388 v1(109.525,86.375) ; C7.1@107.925,86.375 107.925,84.847 ; v1(108.05,67.65) 108.09,67.69 108.741,67.69 109.725,68.675 U2.1 109.725,66.982 109.65,66.907 v1(109.65,66.85) ; v1(109.461,83.525) C14.1 107.925,84.847 ; J2.16 112.11,64.815 112.11,65.535 v1(112.15,65.575) ; J1.16 110.49,94.442 112.525,92.407 v1(112.525,92.35) ; C13.1 112.901,77.725 114.625,77.725 v1(114.65,77.75) ; v1(115.475,66.675) 115.515,66.715 117.216,66.715 C16.1 ; C18.1 119.851,63.95 120.835,62.966 120.835,62.24 v1(120.875,62.2) 121.514,62.839 CR4.2 ; CR1.2 120.361,81.6 120.374,81.612 121.187,81.612 v1(121.2,81.625) ; J4.5 J4.SH6@128.375,84.4 ; C9.1 83.514,81.536 C11.1@83.514,84.514 ; C9.1 83.786,81.242 83.786,80.809 84.245,80.35
  Top Layer 1 w0.7: CR3.2 123.535,87.662 123.572,87.625 v1(123.575,87.625) ; C15.1 126.072,77.25 126.472,76.85 v1(126.475,76.85) ; CR2.2 125.275,74.827 126.473,76.025 126.473,76.848 v1(126.475,76.85) ; 126.477,77.377 126.477,76.852 v1(126.475,76.85) ; v1(126.925,84.425) J4.SH6 129.55,84.425 130.045,83.93 130.045,83.905 131.025,82.925 J4.SH2 ; J4.SH5 128.35,77.428 129.1,76.678 v1(129.1,76.675) 129.102,76.677 129.102,76.865 130.662,78.425 J4.SH1 131.01,78.425 130.975,78.46 130.975,79.15 131.05,79.225 J4.SH3 J4.SH2 ; J4.SH4 J4.SH2
GPIO_0: J3.02 U1.59 | length 64.9
  Top Layer 1 w0.254: U1.59 106.896,76.054 107.35,75.6 v1(107.35,74.825)
  Bottom Layer 1 w0.254: J3.02 64.72,66.507 64.72,66.005 70.725,60 72.35,60 73.459,58.891 100.441,58.891 101.95,60.4 104.475,60.4 106.625,62.55 106.625,71.825 107.35,72.55 v1(107.35,74.825)
GPIO_1: J3.04 U1.57 | length 63.3
  Top Layer 1 w0.254: U1.57 103.782,75.054 103.978,75.249 104.224,75.249 104.645,75.67 105.405,75.67 106.3,74.775 106.3,74.075 105.975,73.75 v1(105.975,73.4)
  Bottom Layer 1 w0.254: J3.04 65.675,68.092 65.675,65.9 70.925,60.65 72.675,60.65 73.975,59.35 99.4,59.35 101.175,61.125 102.883,61.125 104.15,62.392 104.15,63.775 105.975,65.6 v1(105.975,73.4)
GPIO_2: J3.06 U1.67 | length 45.8
  Top Layer 1 w0.254: v1(89.575,76.825) 91.675,76.825 95.075,80.225 95.075,81.07 96.375,82.37 96.375,82.608 96.524,82.757 99.873,82.757 102.497,80.133 102.553,80.133 102.632,80.054 U1.67
  Bottom Layer 1 w0.254: J3.06 65.406,70.901 70.851,70.901 76.8,76.85 89.55,76.85 v1(89.575,76.825)
I2C2_SCL: J2.1 R7.2 U1.46 | length 32.1
  Top Layer 1 w0.254: J2.1 73.845,64.65 91.525,64.65 92.174,65.299 92.174,67.574 92.323,67.722 93.22,67.722 R7.2 93.875,68.377 93.875,68.951 94.024,69.1 98.931,69.1 99.451,69.62 99.451,70.32 U1.46
I2C2_SDA: J2.2 R6.2 U1.47 | length 32.2
  Top Layer 1 w0.254: J2.2 75.99,64.255 97.332,64.255 98.125,65.049 98.125,67.276 97.629,67.772 97.23,67.772 R6.2 98.505,68.103 99.951,69.549 99.951,69.723 99.964,69.735 U1.47
LED_1: R2.2 U1.43 | length 54.6
  Top Layer 1 w0.254: U1.43@97.964,70.339 97.977,70.352 97.977,71.381 99.346,72.75 101.38,72.75 103.355,70.775 v1(108,70.775) ; R2.2 121.075,91.078 v1(121.075,89.525)
  Bottom Layer 1 w0.254: v1(108,70.775) 109.725,72.5 110.799,72.5 112.024,71.275 125.076,71.275 125.225,71.424 125.225,88.9 124.6,89.525 v1(121.075,89.525)
LED_2: R1.2 U1.24 | length 8.9
  Top Layer 1 w0.254: R1.2 84.495,69.55 86.841,71.895 86.841,72.262 86.94,72.362 86.953,72.362 87.145,72.554 U1.24
LED_3: R3.2 U1.61 | length 32.4
  Top Layer 1 w0.254: U1.61 105.454,77.054 v1(105.525,77.125) ; v1(119.1,93.55) 120.889,93.55 R3.2
  Bottom Layer 1 w0.254: v1(105.525,77.125) 107.275,77.125 109.4,79.25 118.025,79.25 119.05,80.275 119.05,93.5 v1(119.1,93.55)
NetC16_2: C16.2 U2.3 U3.1 U4.1
NetC18_2: C18.2 CR4.1 J2.9 U4.2 | length 35.8
  Top Layer 1 w0.7: J2.9 92.892,63.013 92.892,62.233 93.65,61.475 111.575,61.475 115.504,65.404 119.105,65.404 119.118,65.417 119.592,65.417 C18.2 ; C18.2@119.851,65.601 120.312,66.061 CR4.1 122.768,66.104 122.768,68.807 U4.2
NetJ3_03: J3.03 U1.14 | length 25
  Top Layer 1 w0.254: J3.03 67.26,69.535 67.26,70.101 68.859,71.7 78.375,71.7 80.3,73.625 80.3,74.525 82.116,76.341 85.658,76.341 86.859,77.541 87.73,77.541 U1.14
NetJ3_08: J3.08 U1.56 | length 67.8
  Top Layer 1 w0.254: U1.56 103.188,74.552 105.098,74.552 v1(105.1,74.55)
  Bottom Layer 1 w0.254: J3.08 64.476,74.27 63.25,73.044 63.25,70.57 63.399,70.422 65.497,70.422 65.75,70.168 65.75,69.242 66.967,68.025 67.893,68.025 68.775,67.143 68.775,63.593 71.068,61.3 72.925,61.3 74.404,59.821 98.357,59.821 101.631,63.096 101.631,64.426 102.272,65.067 104.892,65.067 105.496,65.671 105.496,69.133 105.1,69.528 v1(105.1,74.55)
NetJ3_10: J3.10 U1.55 | length 47.9
  Top Layer 1 w0.254: v1(70.3,72.85) 70.387,72.937 71.026,72.937 71.039,72.95 v1(74.975,72.95) ; v1(89.325,75.45) 92.45,75.45 97.407,80.407 97.618,80.407 98.95,79.075 98.95,79.025 102.184,75.791 102.184,74.446 102.384,74.246 102.396,74.246 102.589,74.054 U1.55
  Bottom Layer 1 w0.254: J3.10 65.406,75.981 68.444,75.981 70.488,73.937 70.488,73.558 70.387,73.457 70.387,72.937 v1(70.3,72.85) ; v1(74.975,72.95) 75.7,73.675 84.184,73.675 84.855,74.346 88.221,74.346 v1(89.325,75.45)
NetLED1_2: LED1.2 R1.1 | length 2
  Top Layer 1 w0.254: LED1.2 76.35,69.55 R1.1
NetLED2_2: LED2.2 R3.1 | length 2.9
  Top Layer 1 w0.254: R3.1 LED2.2
NetLED3_2: LED3.2 R2.1 | length 3
  Top Layer 1 w0.254: R2.1 125.758,91.186 LED3.2
OSC_IN: C2.2 U1.12 Y1.1 | length 16.6
  Top Layer 1 w0.254: Y1.1 75.625,78.426 C2.2 76.13,78.931 76.13,79.19 76.59,79.65 78.625,79.65 81.082,77.193 84.705,77.193 86.066,78.554 U1.12
OSC_OUT: C3.2 U1.13 Y1.3 | length 12.7
  Top Layer 1 w0.254: Y1.3 76.675,74.75 76.923,74.502 77.019,74.502 77.072,74.45 C3.2 79.256,74.856 79.469,74.856 79.481,74.869 79.528,74.869 81.417,76.757 85.187,76.757 86.457,78.027 87.019,78.027 87.033,78.041 87.133,78.041 87.145,78.054 U1.13
"PB8 Gpio Button": C1.2 S1.2 S1.4 U1.95 | length 34.6
  Top Layer 1 w0.254: C1.2 71.576,88.425 72.55,88.425 72.836,88.139 86.371,88.139 88.863,85.647 88.863,85.234 89.31,84.787 91.751,84.787 91.951,84.987 91.951,85.763 U1.95
  Top Layer 1 w0.5: S1.2 68.25,87.833 ; S1.4 68.25,87.833 ; C1.2 68.992,88.575 68.25,87.833
USB_FS_CN_N: CR1.4 J4.2 | length 5.9
  Top Layer 1 w0.25: CR1.4 123.075,80.65 123.517,81.092 123.517,81.179 123.664,81.325 128.325,81.325 J4.2
USB_FS_CN_P: CR1.6 J4.3 | length 5.9
  Top Layer 1 w0.25: CR1.6 123.075,82.55 123.517,82.107 123.517,82.021 123.664,81.875 128.325,81.875 J4.3
USB_FS_ID: CR3.1 J4.4 U1.69 | length 31.8
  Top Layer 1 w0.254: U1.69 118.046,81.054 119.6,79.5 121.1,79.5 122.075,80.475 122.075,84.138 CR3.1 122.662,84.588 124.675,82.575 J4.4
USB_FS_N: CR1.3 U1.70 | length 17.3
  Top Layer 1 w0.25: U1.70 119.021,81.554 119.925,80.65 CR1.3
USB_FS_P: CR1.1 U1.71 | length 17.2
  Top Layer 1 w0.25: U1.71 119.429,82.054 119.925,82.55 CR1.1
USB_FS_VBUS: R5.1 U1.68 | length 3.3
  Top Layer 1 w0.305: U1.68 105.296,80.554 105.479,80.371 105.79,80.371 106.095,80.066 R5.1
VCAP1: C4.2 U1.48 | length 2.3
  Top Layer 1 w0.254: U1.48 100.464,69.361 100.55,69.275
  Top Layer 1 w0.5: C4.2 100.425,69.15 100.55,69.275
VCAP2: C14.2 U1.73 | length 3.3
  Top Layer 1 w0.254: U1.73 104.729,83.054 104.775,83.1
  Top Layer 1 w0.5: 104.775,83.1 105.225,83.1 105.485,83.36 C14.2@106.385,83.36
pads on no net: CR1.5 J2.10 J2.11 J2.12 J2.13 J2.14 J2.15 U1.1 U1.2 U1.7 U1.8 U1.9 U1.15 U1.16 U1.17 U1.18 U1.22 U1.23 U1.25 U1.29 U1.31 U1.32 U1.34 U1.36 U1.38 U1.40 U1.42 U1.45 U1.51 U1.53 U1.54 U1.58 U1.60 U1.62 U1.65 U1.77 U1.79 U1.81 U1.82 U1.85 U1.86 U1.88 U1.90 U1.91 U1.92 U1.96 U1.97 U1.98

## Polygon pours and split planes (outlines as drawn)
3V3 on Top Layer 1 "NONET_L02_P-001" (solid, pour order 2): 110.275,76.575 110.325,76.625 110.325,78.85 111.625,78.85 111.875,78.6 111.875,76.525 110.5,76.525
NetC16_2 on Top Layer 1 "NONET_L02_P-001" (solid, pour order 1): 113.875,70 113.9,69.975 116.225,69.975 116.225,70.875 116.975,71.625 120.25,71.625 120.475,71.4 120.475,67.75 113.85,67.75 113.625,67.975 113.625,69.875
3V3 on Top Layer 1 "NONET_L02_P-001" (solid, pour order 0): 111.3,68.25 111.1,68.45 111.1,70.95 110.5,70.95 109.4,72.05 109.4,76.3 109.775,76.675 114.35,76.675 114.75,76.275 114.75,71.15 113.45,71.15 113.125,70.825 113.125,68.075 111.475,68.075 111.1,68.45
GND on GND (split plane): 131.099,99.782 131.215,99.755 131.326,99.709 131.428,99.646 131.519,99.569 131.596,99.478 131.659,99.376 131.705,99.265 131.732,99.149 131.741,99.043 131.74,99.03 131.74,58.975 131.741,58.964 131.734,58.875 131.71,58.777 131.672,58.684 131.619,58.598 131.554,58.521 131.477,58.456 131.391,58.403 131.298,58.365 131.2,58.341 131.111,58.334 131.1,58.335 61.17,58.335 61.157,58.334 61.051,58.343 60.935,58.37 60.824,58.416 60.722,58.479 60.631,58.556 60.554,58.647 60.491,58.749 60.445,58.86 60.418,58.976 60.409,59.082 60.41,59.095 60.41,99.03 60.409,99.043 60.418,99.149 60.445,99.265 60.491,99.376 60.554,99.478 60.631,99.569 60.722,99.646 60.824,99.709 60.935,99.755 61.051,99.782 61.157,99.791 61.17,99.79 130.98,99.79 130.993,99.791
3V3 on 3V3 (split plane): 131.099,99.782 131.215,99.755 131.326,99.709 131.428,99.646 131.519,99.569 131.596,99.478 131.659,99.376 131.705,99.265 131.732,99.149 131.741,99.043 131.74,99.03 131.74,58.975 131.741,58.964 131.734,58.875 131.71,58.777 131.672,58.684 131.619,58.598 131.554,58.521 131.477,58.456 131.391,58.403 131.298,58.365 131.2,58.341 131.111,58.334 131.1,58.335 61.17,58.335 61.157,58.334 61.051,58.343 60.935,58.37 60.824,58.416 60.722,58.479 60.631,58.556 60.554,58.647 60.491,58.749 60.445,58.86 60.418,58.976 60.409,59.082 60.41,59.095 60.41,99.03 60.409,99.043 60.418,99.149 60.445,99.265 60.491,99.376 60.554,99.478 60.631,99.569 60.722,99.646 60.824,99.709 60.935,99.755 61.051,99.782 61.157,99.791 61.17,99.79 130.98,99.79 130.993,99.791

## Silkscreen, mask and mechanical layers (free items; w line width, h text height)
Top Overlay:
  text "GND" at 109.61,96.86 h1.1
  text "BT" at 60.935,79.085 h1.1
  text "3V3" at 69.21,79.01 h1.1
  text "SWCLK" at 68.66,76.66 h1.1
  text "TX" at 60.96,76.585 h1.1
  text "RX" at 60.96,74.16 h1.1
  text "GND" at 68.96,73.935 h1.1
  text "G2" at 60.885,71.41 h1.1
  text "SWDIO" at 68.86,71.31 h1.1
  text "NRST" at 68.76,68.86 h1.1
  text "G1" at 61.06,68.835 h1.1
  text "G0" at 60.935,66.335 h1.1
  text "SWO" at 68.66,66.285 h1.1
  text "GND" at 109.235,59.51 h1.1
Mechanical 13:
  lines w0.254: 118.73,57.75 61.27,57.75 cw(c61.27,59.02) 60,59.02 60,98.98 cw(c61.27,98.98) 61.27,100.25 62.5,100.25 118.73,100.25

## Text inside footprints (layer, text, board x,y; h text height)
CR1: Mechanical 13 "*" at 120.687,81.778 h1.27
CR2: Mechanical 13 "*" at 122.152,74.14 h1.27
CR3: Mechanical 13 "*" at 122.26,84.614 h1.27 r90
CR4: Mechanical 13 "*" at 122.09,65.961 h1.27 r270
J4: Mechanical 13 "PCB EDGE" at 132.3,86.175 h0.81 r90